# Altium PCB PCB_Rev1.PcbDoc
Units mil, origin at the board's own origin, x right, y up, seen from the top; angles counter-clockwise.
Board outline 2100.17 x 1100.17 mil, 4 copper layers (Top Layer, Power, GND, Bottom Layer), stack 61.2 mil thick; 62 components, 44 nets, 285 pads, 79 vias.
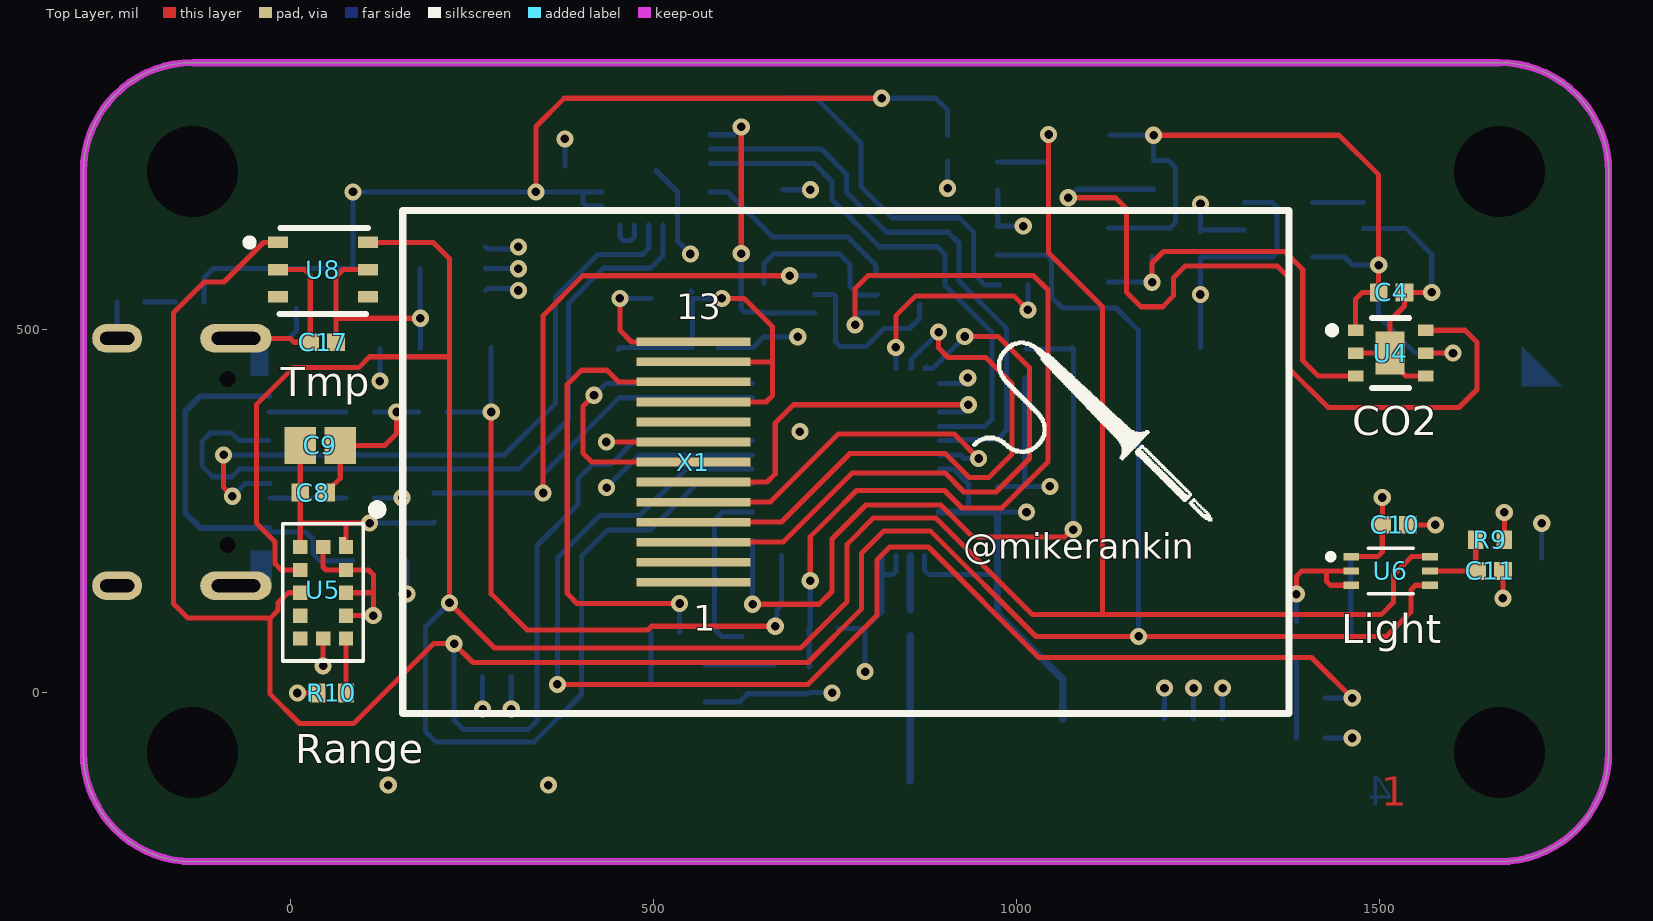
[diagram p0: Top Layer view]
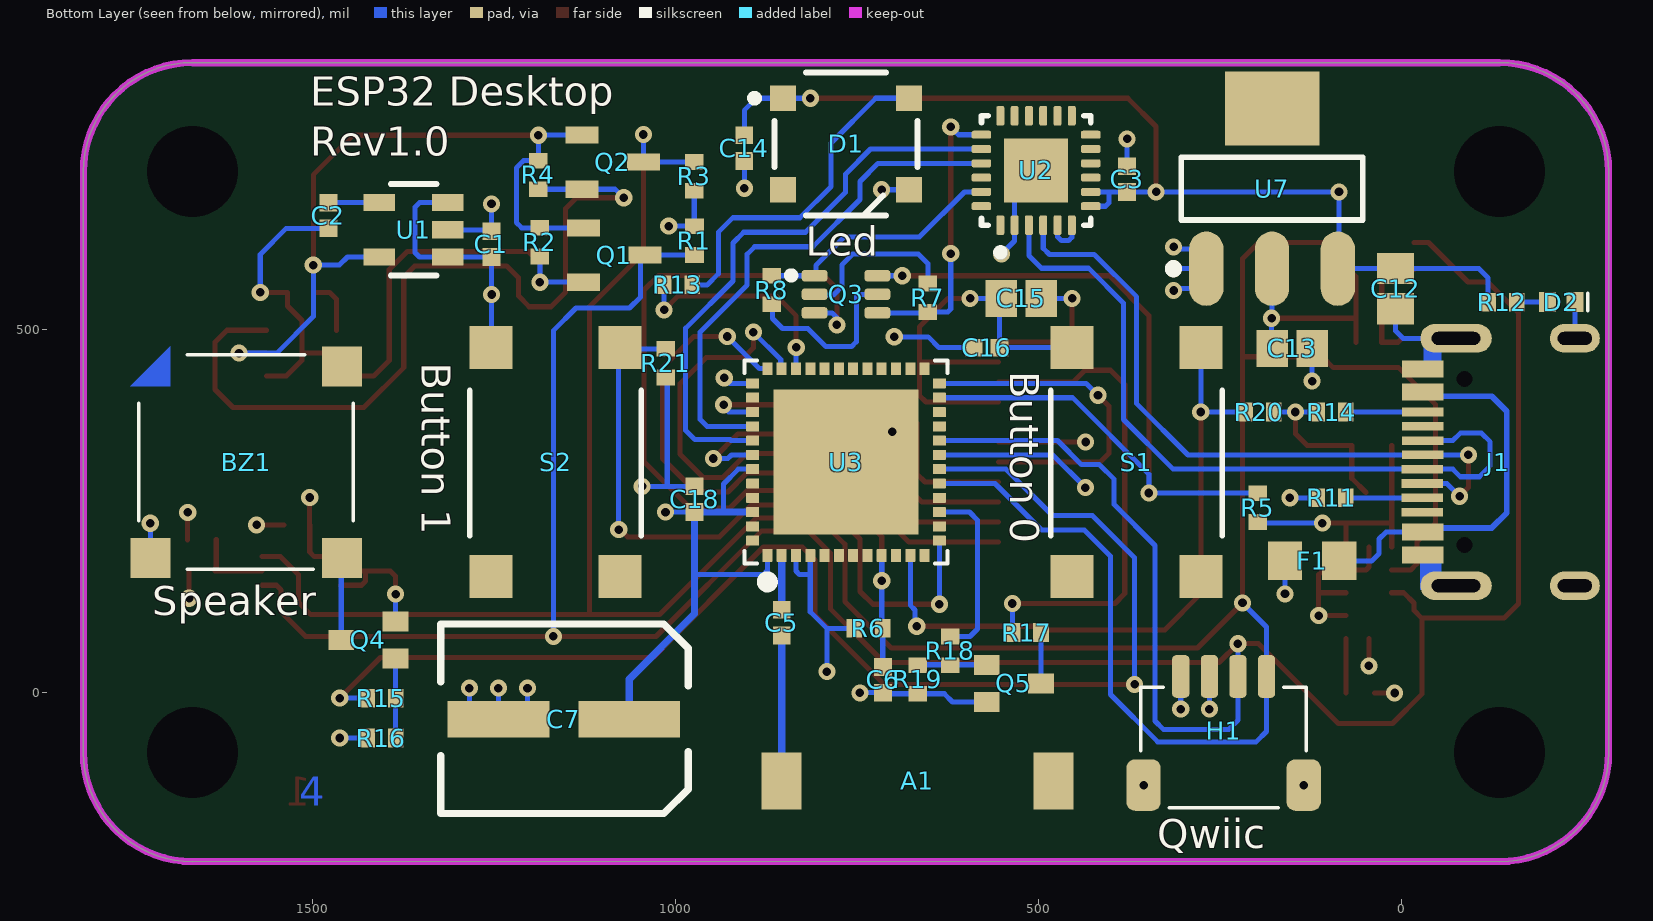
[diagram p1: Bottom Layer view, seen from below]
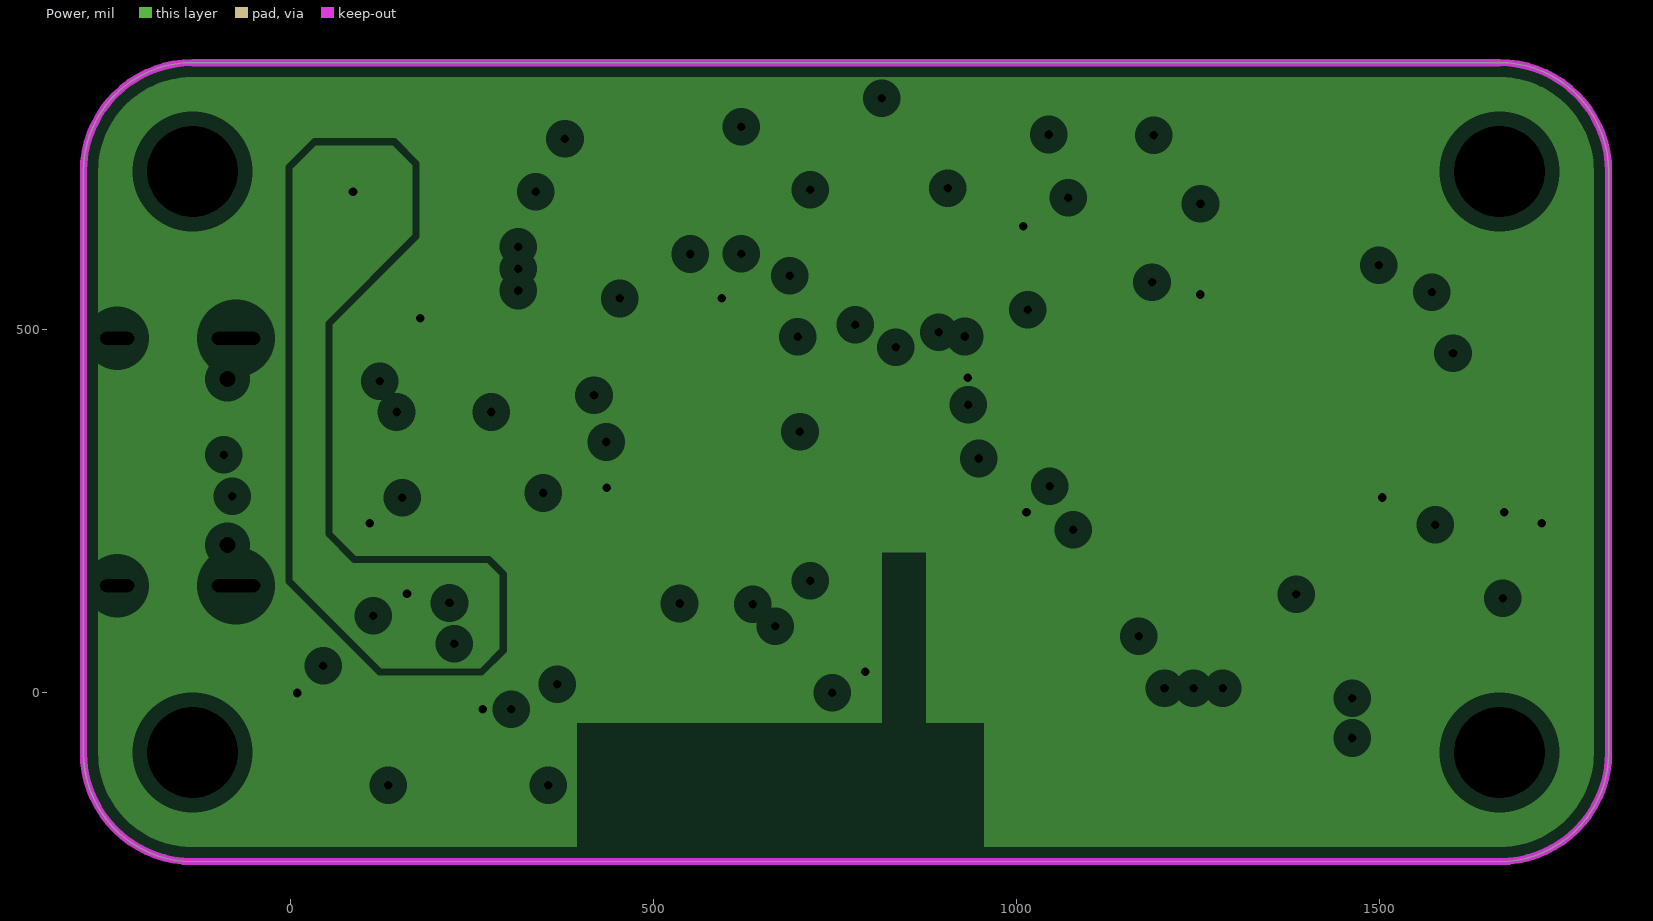
[diagram p2: Power, clearances drawn from the general rule]
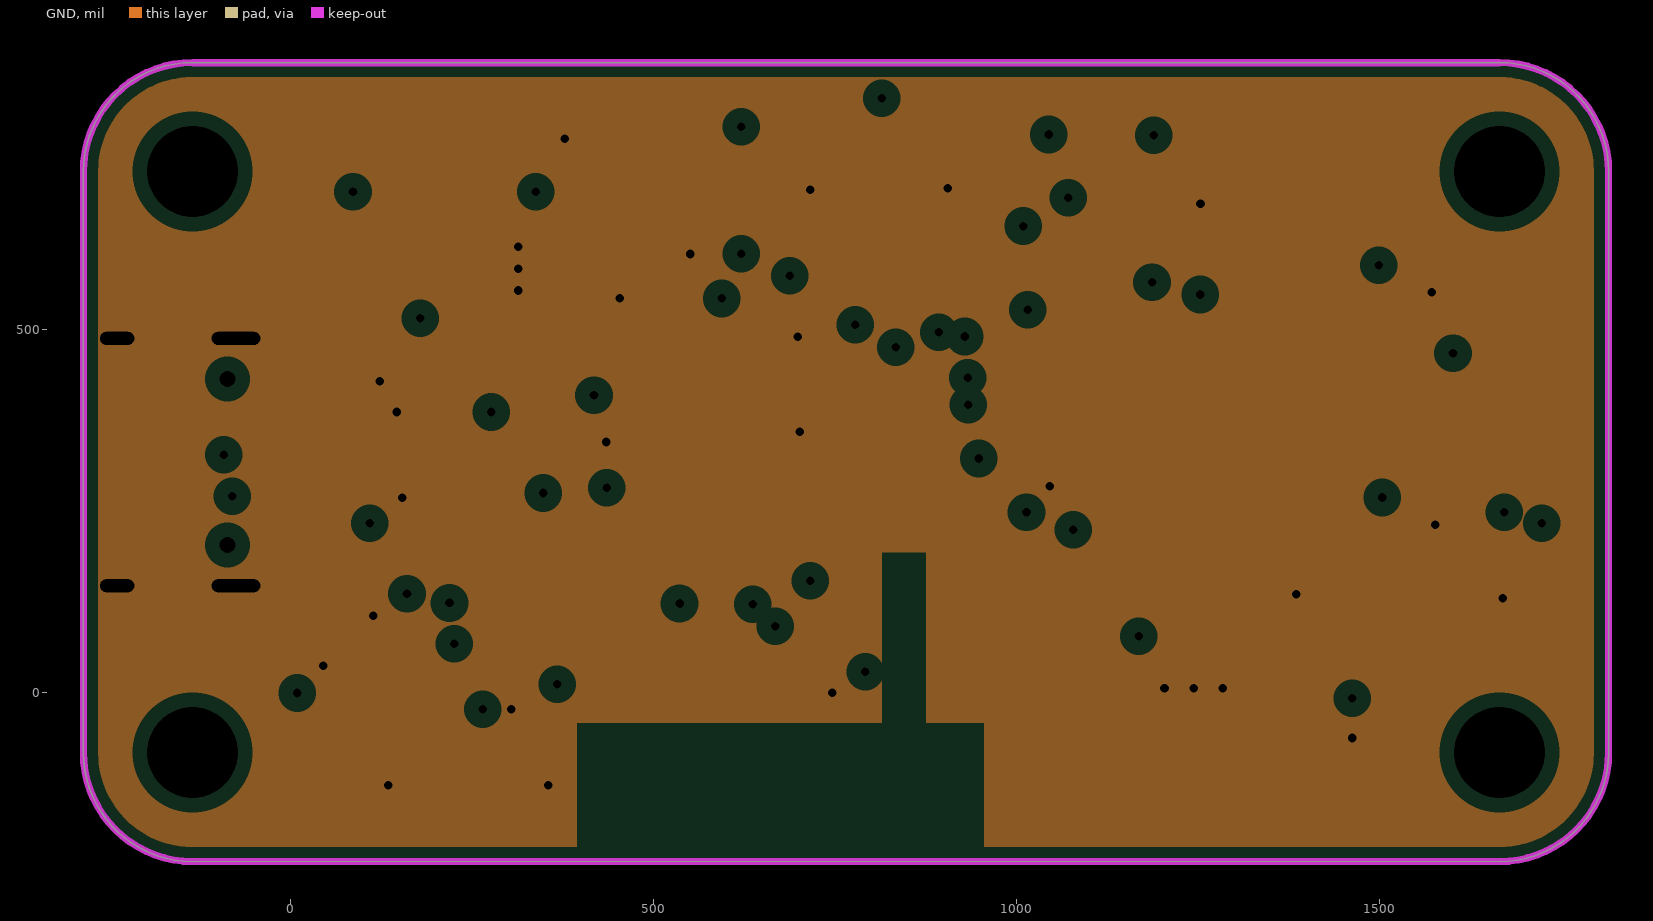
[diagram p3: GND, clearances drawn from the general rule]
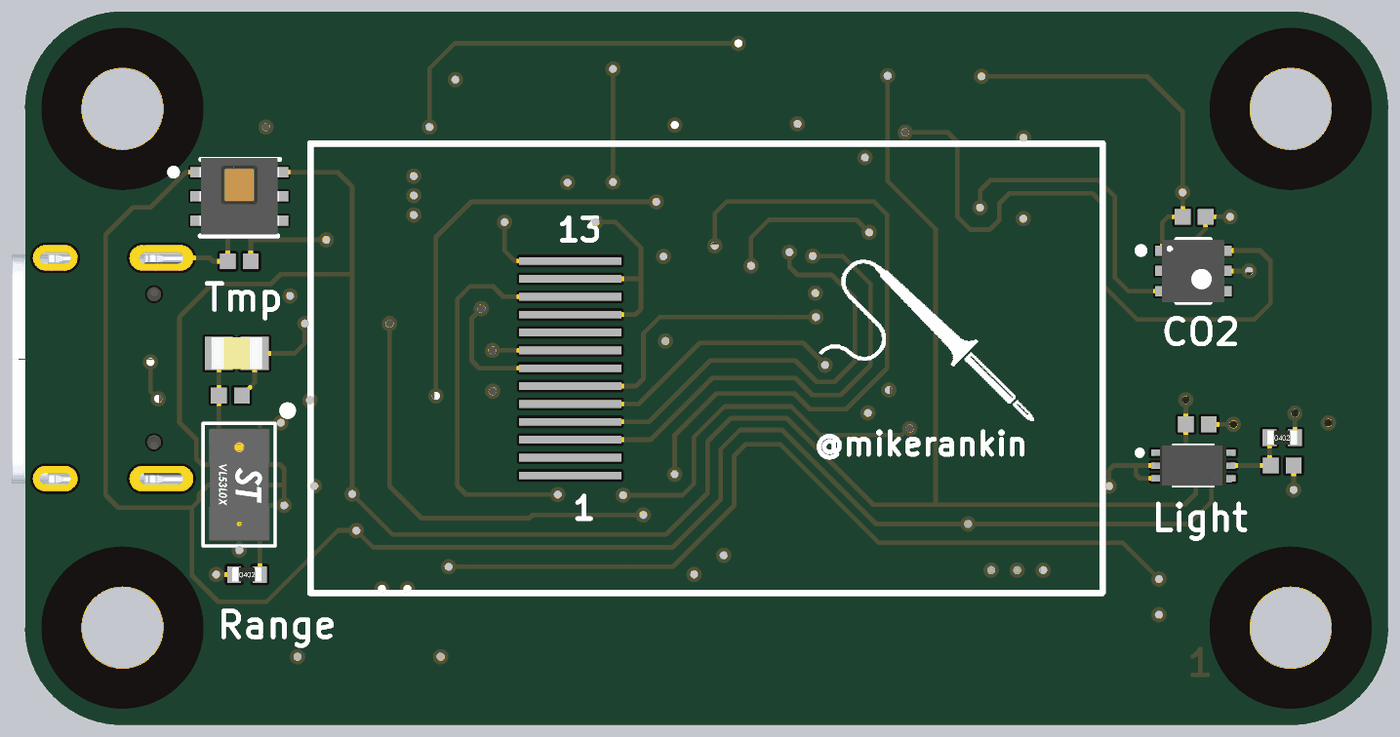
[diagram p4: 3D render of the assembled board from above, using the file's embedded part models]
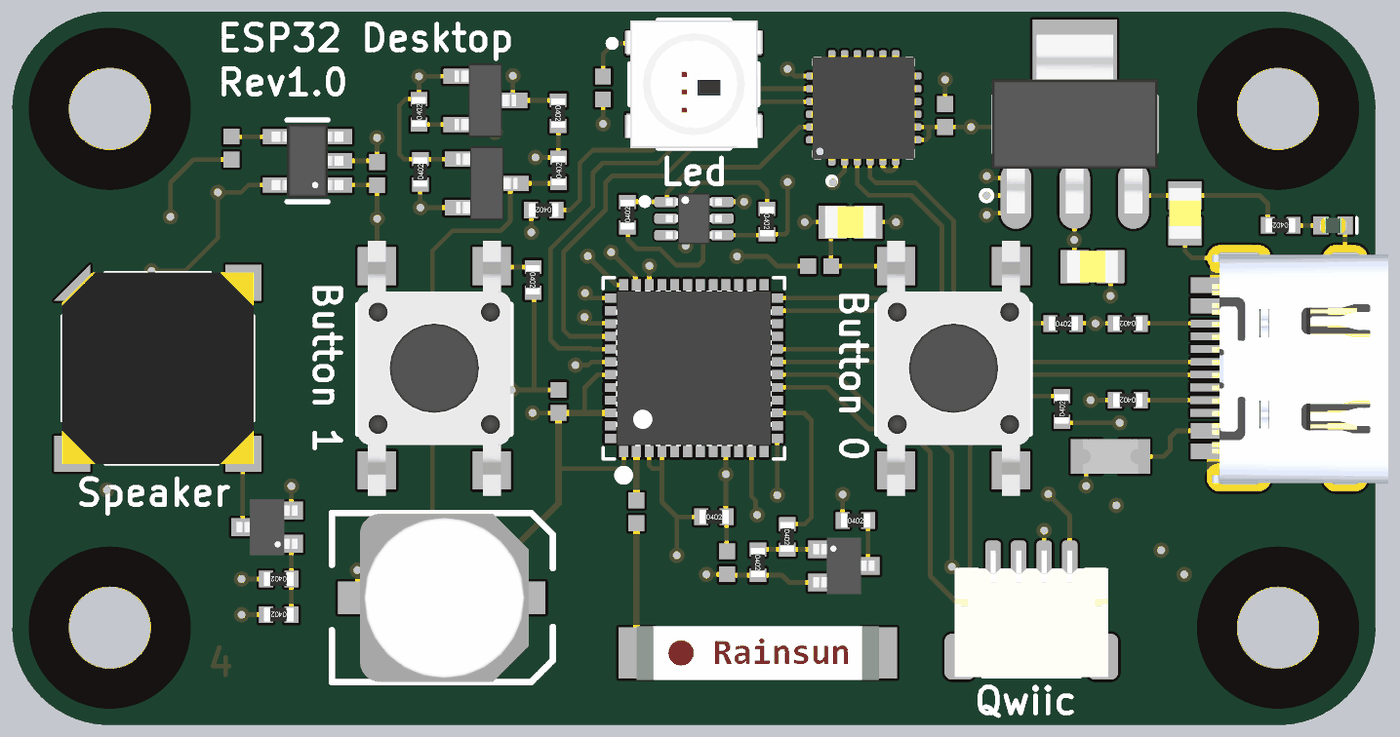
[diagram p5: 3D render of the assembled board from below, using the file's embedded part models]

## Layer stack, top to bottom
Top Solder: solder mask 0.4, Solder Resist, Dk 3.5
Top Layer: signal copper 1.4
Dielectric 2: prepreg 2.8, PP-006, Dk 4.1
Power: plane copper 1.3, net +3.3V
Dielectric 1: dielectric 50.2, FR-4, Dk 4.8
GND: plane copper 1.3, net GND
Dielectric 3: prepreg 2.8, PP-006, Dk 4.1
Bottom Layer: signal copper 1.4
Bottom Solder: solder mask 0.4, Solder Resist, Dk 3.5

## Board outline
-134.49,-232.09 cw(c-134.49,-82.01) -284.57,-82.01 -284.49,-82.01 -284.49,717.99 -284.57,717.99 cw(c-134.49,717.99) -134.49,868.08 -134.49,867.99 1665.51,867.99 1665.51,868.08 cw(c1665.51,717.99) 1815.59,717.99 1815.51,717.99 1815.51,-82.01 1815.59,-82.01 cw(c1665.51,-82.01) 1665.51,-232.09 1665.51,-232.01

## Design rules (kind name [scope] priority, off if disabled: settings)
Clearance Clearance_U6 [All vs InComponent('U6')] p1: gap=5 ignorepadtopadclearanceinfootprint=FALSE
Clearance Clearance_U3 [All vs InComponent('U3')] p2: gap=5.9 ignorepadtopadclearanceinfootprint=FALSE
Clearance Clearance_Q3 [All vs InComponent('Q3')] p3: gap=5 ignorepadtopadclearanceinfootprint=FALSE
Clearance Clearance_U2 [All vs InComponent('U2')] p4: gap=8 ignorepadtopadclearanceinfootprint=FALSE
Clearance Clearance_J1 [All vs InComponent('J1')] p5: gap=7 ignorepadtopadclearanceinfootprint=FALSE
Clearance [All] p6: gap=10 ignorepadtopadclearanceinfootprint=FALSE except(0: Arc-Hole Track-Hole SMDPad-Hole THPad-Hole Via-Hole Fill-Hole Poly-Hole Region-Hole Text-Hole)
HoleSize [All] p1: absolutevalues=TRUE maxlimit=500 minlimit=1 maxpercent=80.000 minpercent=20.000
MinimumSolderMaskSliver [All] p1: minsoldermaskwidth=0.6
PlaneClearance [All] p1: clearance=20
PlaneConnect [All] p1: planeconnectstyle=Relief reliefexpansion=20 reliefentries=4 reliefconductorwidth=10 reliefairgap=10
PolygonConnect PolygonConnect_Via [All vs (IsVia)] p1: connectstyle=Direct reliefconductorwidth=10 reliefentries=4 polygonreliefangle="90 Angle" airgapwidth=10
PolygonConnect [All] p2: connectstyle=Relief reliefconductorwidth=10 reliefentries=4 polygonreliefangle="90 Angle" airgapwidth=10
RoutingVias [All] p1: holewidth=28 width=50 viastyle="Through Hole" minholewidth=28 minwidth=50 maxholewidth=28 maxwidth=50
SilkToSilkClearance [All] p1: silktosilkclearance=2
SilkToSolderMaskClearance [IsPad] p1: minsilkscreentomaskgap=2 clearancetoexposedcopper=TRUE
SolderMaskExpansion [All] p1: expansion=4 istentingtop=FALSE
Width [All] p1: maxlimit=50 minlimit=7 preferedwidth=7
24 further rules are at their usual default settings.

## Components (designator, comment, footprint, x,y, rotation, side; value= is the part's Value field where it differs from the comment)
A1 "Antenna_Chip" AN9520-245 667.09,-120.98 r270 bottom value="Chip Antenna"
BZ1 "BUZZER" ST-025BH 1723.48,186.1 r270 bottom locked
C1 "1uF" CAPC1005X56N 1253.7,618.11 r90 bottom
C2 "22nF" CAPC1005X56N 1478.19,657.48 r270 bottom
C3 "1uF" CAPC1005X56N 378.5,707.68 r90 bottom
C4 "0.1uF" CAPC1005X56N 1516.73,551.56 r0 top
C5 "1.5pF" CAPC1005X56N 854.09,96.73 r270 bottom
C6 "0.1uF" CAPC1005X56N 714.5,18.18 r270 bottom
C7 "150uF" CAP_SM_CAN_0.250_DIA 1064.09,-35.98 r270 bottom
C8 "0.1uF" CAPC1005X56N 31.73,275.98 r0 top
C9 "10uF" CAPC2012X140N 41.57,340.98 r0 top
C10 "0.1uF" CAPC1005X56N 1521.73,231.56 r0 top
C11 "1uF" CAPC1005X56N 1652.36,167.99 r0 top
C12 "10uF" CAPC2012X140N 8.8,556.93 r270 bottom
C13 "10uF" CAPC2012X140N 151.24,474.49 r180 bottom
C14 "0.1uF" CAPC1005X56N 905.51,750.28 r270 bottom
C15 "10uF" CAPC2012X140N 524.37,543.27 r180 bottom
C16 "0.1uF" CAPC1005X56N 571.81,475.47 r0 bottom
C17 "0.1uF" CAPC1005X56N 45.51,482.99 r180 top
C18 "0.1uF" CAPC1005X56N 974.05,266.81 r90 bottom
D1 "RGB" SMD-5050 765.51,755.98 r180 bottom locked value=NeoPixel
D2 "Green Led" LED1005X40N-Green -219.37,538.27 r0 bottom
F1 "TLC-PSMD050" PTC2012X70L 123.66,181.89 r180 bottom
H1 "QWiiC" SM04B-SRSS-TB 245.51,-52.01 r180 bottom locked
J1 "USB-C" TYPE-C-31-M-12 -230.2,488.27 r90 bottom locked
Q1 "" SOT95P240X110-3N 1084.61,603.07 r180 bottom
Q2 "" SOT95P240X110-3N 1086.81,731.02 r180 bottom
Q3 "BC847S" SOT65P210X110-6N 765.51,547.99 r180 bottom value=2NPN
Q4 "MMST3904" SC-70 1423.11,72.99 r0 bottom
Q5 "MMST3904" SC-70 534.33,13.27 r180 bottom
R1 "4.7K" "RESC1005X40L (0402 FOOTPRINT)" 974.13,622.94 r90 bottom
R2 "4.7K" "RESC1005X40L (0402 FOOTPRINT)" 1186.93,620.79 r90 bottom
R3 "4.7K" "RESC1005X40L (0402 FOOTPRINT)" 974.49,711.34 r270 bottom
R4 "4.7K" "RESC1005X40L (0402 FOOTPRINT)" 1189.13,713.31 r90 bottom
R5 "10K" "RESC1005X40L (0402 FOOTPRINT)" 198.5,255.28 r90 bottom
R6 "10K" "RESC1005X40L (0402 FOOTPRINT)" 734.58,88.98 r180 bottom
R7 "10K" "RESC1005X40L (0402 FOOTPRINT)" 652.85,544.17 r270 bottom
R8 "10K" "RESC1005X40L (0402 FOOTPRINT)" 867.85,554.8 r90 bottom
R9 "1K" "RESC1005X40L (0402 FOOTPRINT)" 1652.33,210.99 r0 top
R10 "10K" "RESC1005X40L (0402 FOOTPRINT)" 57.32,0 r0 top
R11 "5.1K" "RESC1005X40L (0402 FOOTPRINT)" 96.93,268.78 r0 bottom
R12 "22K" "RESC1005X40L (0402 FOOTPRINT)" -138.39,538.27 r0 bottom
R13 "100R" "RESC1005X40L (0402 FOOTPRINT)" 996.94,561.89 r0 bottom
R14 "5.1K" "RESC1005X40L (0402 FOOTPRINT)" 96.94,386.89 r0 bottom
R15 "1K" "RESC1005X40L (0402 FOOTPRINT)" 1405.2,-7.01 r0 bottom
R16 "10K" "RESC1005X40L (0402 FOOTPRINT)" 1405.2,-62.01 r0 bottom
R17 "22R" "RESC1005X40L (0402 FOOTPRINT)" 516.61,83.27 r180 bottom
R18 "1K" "RESC1005X40L (0402 FOOTPRINT)" 621.93,57.95 r270 bottom
R19 "10K" "RESC1005X40L (0402 FOOTPRINT)" 666.93,18.58 r270 bottom
R20 "10K" "RESC1005X40L (0402 FOOTPRINT)" 196.31,386.89 r180 bottom
R21 "10K" "RESC1005X40L (0402 FOOTPRINT)" 1013.5,454.21 r270 bottom
S1 "PushButton" TSA063G70-250 365.51,317.99 r180 bottom locked
S2 "PushButton" TSA063G70-250 1165.51,317.99 r180 bottom locked
U1 "1.8V LDO" SOT95P280X144-5N 1360.94,637.8 r0 bottom
U2 "CP2104N" 24-QFN 503.8,719.49 r90 bottom locked
U3 "ESP32-PICO-D4" "QFN48_NEWEST 0.5mm pitch" 765.51,317.99 r90 bottom locked
U4 "SGP30" "DFN-6 (2.45mm X 2.45mm)" 1515.51,467.99 r0 top
U5 "VL53L0CXV0DH" VL53L0CXV0DH 45.51,142.42 r0 top locked value=VL53L0CXV0DH/1
U6 "BH1750FVI" WSOF-6 1515.51,167.99 r0 top
U7 "NCP1117LPST33T3G" SOT230P700X180-4N 178.8,694.49 r270 bottom value="3.3V 1A LDO"
U8 "HDC1080DMBT" HDC1080 45.51,582.99 r0 top
X1 "TFT_1.14\"" "TFT_GLASS 1.14 INCH" 555.51,318.05 r0 top locked

## Footprints (in the part's own frame and the unit in brackets; to place one, negate y for a bottom-side part, rotate by r counter-clockwise, add the part's x,y. Pads: shape width x height; smd on the part's side, far side on the other; paste and mask are expansions set on the pad)
24-QFN [mm] "24-QFN Exposed Pad (4x4)"
  rrect50% 0.69x0.28 smd: 1(-1.912,1.25) 2(-1.912,0.75) 3(-1.912,0.25) 4(-1.912,-0.25) 5(-1.912,-0.75) 6(-1.912,-1.25) 13(1.913,-1.25) 14(1.913,-0.75) 15(1.913,-0.25) 16(1.913,0.25) 17(1.913,0.75) 18(1.913,1.25)
  rrect50% 0.28x0.69 smd: 7(-1.25,-1.913) 8(-0.75,-1.913) 9(-0.25,-1.913) 10(0.25,-1.913) 11(0.75,-1.913) 12(1.25,-1.913) 19(1.25,1.913) 20(0.75,1.913) 21(0.25,1.913) 22(-0.25,1.913) 23(-0.75,1.913) 24(-1.25,1.913)
  rect 2.25x2.25 smd paste-1.3: 25(0,0)
  silkscreen extent -2.99,-1.91 1.91,1.91, body extent -2.05,-2.04 2.05,2.06, height 1.08
AN9520-245 [mm] "Antenna Chip"
  rect 2x1.4 smd: 1(0,-4.75) ""(0,4.75)
  body extent -1.05,-4.75 1.05,4.75, height 1.05
CAP_SM_CAN_0.250_DIA [mil] "SMD Eledtrolytic Capacitor 0.250 DIA"
  rect 50x140 smd: 1(0,0) 2(0,-180)
  silkscreen extent -131,-259 130,81, body extent -130,-216 130,44, height 240
CAPC1005X56N [mm] "Chip Capacitor, 2-Leads, Body 1.0x0.5mm, IPC Medium Density (0402 ceramic)"
  rect 0.62x0.62 smd: 1(-0.45,0) 2(0.45,0)
  body extent -0.55,-0.3 0.55,0.3, height 0.6
CAPC2012X140N [mm] "Chip Capacitor, 2-Leads, Body 2.0x1.3mm, IPC Medium Density (0805 ceramic)"
  rect 1.1x1.3 smd: 1(-0.7,0) 2(0.7,0)
  body extent -1,-0.62 1,0.63, height 1.24
"DFN-6 (2.45mm X 2.45mm)" [mm] "DFN-6 (2.45mm X 2.45mm)"
  rect 0.55x0.4 smd mask+0.076: 1(-1.225,0.8) 2(-1.225,0) 3(-1.225,-0.8) 5(1.225,0) 6(1.225,0.8)
  rect 0.55x0.4 smd paste+0 mask+0.076: 4(1.225,-0.8)
  rect 1x1.5 smd mask+0.076: 7(-0.025,0)
  silkscreen extent -2.17,-1.22 0.65,1.23, body extent -1.22,-1.22 1.22,1.22, height 0.85
HDC1080 [mm] "Temp/Humidity Sensor"
  rect 0.7x0.4 smd mask+0.076: 1(-1.575,0.95) 2(-1.575,0) 3(-1.575,-0.95) 5(1.575,0) 6(1.575,0.95)
  rect 0.7x0.4 smd paste+0 mask+0.076: 4(1.575,-0.95)
  silkscreen extent -2.7,-1.55 1.57,1.45, body extent -1.55,-1.5 1.55,1.5, height 0.85
LED1005X40N-Green [mm] "Chip LED 2-Leads, Body 1.0x0.5mm, (0402)"
  rect 0.6x0.7 smd: 1(-0.475,0) 2(0.475,0)
  silkscreen extent -0.92,-0.3 -0.92,0.3, body extent -0.5,-0.3 0.5,0.3, height 0.2
PTC2012X70L [mm] "Chip Fuse, 2-Leads, Body 2.0x1.3mm, IPC Medium Density (0805)"
  rect 1.2x1.35 smd: 1(-0.95,0) 2(0.95,0)
  body extent -1.07,-0.67 1.08,0.68, height 0.66
"QFN48_NEWEST 0.5mm pitch" [mm] "QFN, 48-Leads, Body 7x7mm, Pitch 0.5mm, IPC Medium Density"
  rrect9% 0.45x0.35 smd: 1(-3.265,2.75) 2(-3.265,2.25) 3(-3.265,1.75) 4(-3.265,1.25) 5(-3.265,0.75) 6(-3.265,0.25) 7(-3.265,-0.25) 8(-3.265,-0.75) 9(-3.265,-1.25) 10(-3.265,-1.75) 11(-3.265,-2.25) 12(-3.265,-2.75) 25(3.265,-2.75) 26(3.265,-2.25) 27(3.265,-1.75) 28(3.265,-1.25) 29(3.265,-0.75) 30(3.265,-0.25) 31(3.265,0.25) 32(3.265,0.75) 33(3.265,1.25) 34(3.265,1.75) 35(3.265,2.25) 36(3.265,2.75)
  rrect9% 0.35x0.45 smd: 13(-2.75,-3.265) 14(-2.25,-3.265) 15(-1.75,-3.265) 16(-1.25,-3.265) 17(-0.75,-3.265) 18(-0.25,-3.265) 19(0.25,-3.265) 20(0.75,-3.265) 21(1.25,-3.265) 22(1.75,-3.265) 23(2.25,-3.265) 24(2.75,-3.265) 37(2.75,3.265) 38(2.25,3.265) 39(1.75,3.265) 40(1.25,3.265) 41(0.75,3.265) 42(0.25,3.265) 43(-0.25,3.265) 44(-0.75,3.265) 45(-1.25,3.265) 46(-1.75,3.265) 47(-2.25,3.265) 48(-2.75,3.265)
  rect 5.08x5.08 smd paste-4: 49(0,0)
  silkscreen extent -4.37,-3.55 3.55,3.55, body extent -3.05,-3.05 3.05,3.05, height 0.9
"RESC1005X40L (0402 FOOTPRINT)" [mm] "Chip Resistor, 2-Leads, Body 1.0x0.5mm, IPC Medium Density (0402)"
  rect 0.55x0.65 smd: 1(-0.5,0) 2(0.5,0)
  body extent -0.57,-0.27 0.58,0.28, height 0.41
SC-70 [mm] "SOT23, 3-Leads, Body 2x1.25mm, Pitch 0.65mm"
  rect 0.9x0.7 smd: 1(-0.95,0.65) 2(-0.95,-0.65) 3(0.95,0)
  body extent -1.2,-1.1 1.2,1.1, height 1
SM04B-SRSS-TB [mm] "CONN HEADER 4POS .100 R/A QWIIC"
  rrect50% 0.6x1.5 smd: 1(1.5,1.9) 2(0.5,1.9) 3(-0.5,1.9) 4(-1.5,1.9)
  rrect50% 1.2x1.8 smd: 5(-2.8,-1.9) 5(2.8,-1.9)
  silkscreen extent -2.9,-2.69 2.9,1.52, body extent -3,-2.69 3,2.26, height 3.25
SMD-5050 [mm] "SMD-5050"
  rect 0.9x0.9 smd: 1(-2.2,1.6) 2(-2.2,-1.6) 3(2.2,-1.6) 4(2.2,1.6)
  silkscreen extent -3.26,-2.5 2.5,2.5, body extent -2.7,-2.5 2.7,2.5, height 1.6
SOT65P210X110-6N [mm] "SC70, 6-Leads, Body 2.4x2.2mm (max), Pitch 0.65mm, IPC Medium Density"
  rrect50% 0.9x0.4 smd mask+0.076: 1(-1.1,0.675) 2(-1.1,0.025) 3(-1.1,-0.625) 4(1.1,-0.625) 5(1.1,0.025) 6(1.1,0.675)
  silkscreen extent -2.04,0.56 -1.79,0.81, body extent -1.1,-0.97 1.1,1.01, height 0.99
SOT95P240X110-3N [mm] "SOT23, 3-Leads, Body 3.0x2.5mm (max), Pitch 0.95mm, IPC Medium Density"
  rect 1.15x0.6 smd: 1(-1.075,0.95) 2(-1.075,-0.95) 3(1.075,0)
  body extent -1.2,-1.45 1.2,1.45, height 0.99
SOT95P280X144-5N [mm] "SOT23, 5-Leads, Body 3.1x3.0mm (max), Pitch 0.95mm, IPC Medium Density (RFMD SOT23-5)"
  rect 1.1x0.6 smd: 1(-1.2,0.95) 2(-1.2,0) 3(-1.2,-0.95) 4(1.2,-0.95) 5(1.2,0.95)
  silkscreen extent -0.8,-1.6 0.8,1.6, body extent -1.4,-1.45 1.4,1.45, height 1.45
SOT230P700X180-4N [mm] "SOT223, 4-Leads, Body 6.7x7.3mm (max), Pitch 2.30mm, IPC Medium Density"
  oval 2.6x1.2 smd: 1(2.8,-2.3) 2(2.8,0) 3(2.8,2.3)
  rect 2.6x3.3 smd: 4(-2.8,0)
  silkscreen extent -1.1,-3.58 2.92,3.18, body extent -3.5,-3.25 3.5,3.25, height 1.65
ST-025BH [mm] "BUZZER SMT 2-4V SMD"
  rect 1.4x1.4 smd: 1(0,0) 2(0,6.7) ""(-6.7,6.7)
  Top Layer region: -7.4,0.7 -6,0.7 -6,-0.7
  silkscreen extent -7.1,-0.4 0.4,7.1, body extent -7.1,-0.4 0.4,7.1, height 2.5
"TFT_GLASS 1.14 INCH" [mm] "TFT_GLASS 0.14 INCH"
  rect 4x0.3 smd: 1(0,-4.2) 2(0,-3.5) 3(0,-2.8) 4(0,-2.1) 5(0,-1.4) 6(0,-0.7) 7(0,0) 8(0,0.7) 9(0,1.4) 10(0,2.1) 11(0,2.8) 12(0,3.5) 13(0,4.2)
  silkscreen extent -10.17,-8.8 20.83,8.8, body extent -10.17,-8.8 20.83,8.8, height 2
TSA063G70-250 [mm] "Tactile Switches SPST 6.10mm x 6.10mm 3.50mm 50mA @ 12VDC SMD RoHS"
  rect 1.5x1.5 smd: 1(2.25,4) 2(-2.25,4) ""(-2.25,-4) ""(2.25,-4)
  silkscreen extent -3,-2.58 3,2.5, body extent -3,-5 3,5, height 7.12
TYPE-C-31-M-12 [mm] "USB-C Connector"
  oval 1x1.75 hole 0.45 slot 1.2 at 90 deg: 1(-8.65,-0.2) 1(0,-0.2)
  oval 1x2.5 hole 0.45 slot 1.7 at 90 deg: 1(-8.65,3.955) 1(0,3.955)
  rect 0.3x1.45 smd: A1(-7.726,5.119) A4(-6.926,5.117) A5(-5.575,5.142) A6(-4.575,5.142) A7(-4.075,5.117) A8(-3.075,5.117) A9(-1.727,5.117) A12(-0.924,5.117) B1(-1.224,5.117) B4(-2.021,5.117) B5(-2.575,5.117) B6(-3.575,5.117) B7(-5.075,5.142) B8(-6.075,5.142) B9(-6.626,5.117) B12(-7.426,5.119)
  round 0.508 hole 0.559 unplated: ""(-7.225,3.667) ""(-1.425,3.667)
  body extent -8.82,-1.89 0.12,5.01, height 3.31
VL53L0CXV0DH [mm] "IC,LASER SENSOR,12pin"
  rect 0.25x0.25 smd: 1(0.675,1.713)
  rect 0.5x0.5 smd: 1(0.8,1.488) 2(0.8,0.687) 3(0.8,-0.112) 4(0.8,-0.913) 5(0.8,-1.712) 6(0,-1.712) 7(-0.8,-1.712) 8(-0.8,-0.912) 9(-0.8,-0.112) 10(-0.8,0.688) 11(-0.8,1.488) 12(0,1.488)
  silkscreen extent -1.42,-2.5 2.09,3, body extent -1.2,-2.3 1.2,2.1, height 1
WSOF-6 [mm] "WSOF-6"
  rect 0.55x0.25 smd: 1(-1.375,0.5) 2(-1.375,0) 3(-1.375,-0.5) 4(1.375,-0.5) 5(1.375,0) 6(1.375,0.5)
  silkscreen extent -2.2,-0.8 0.78,0.8, body extent -1.5,-0.8 1.5,0.8, height 0.75

## Part data
A1: "Antenna Chip 2.4Gig", Manufacturer=Rainsun, Part_Number=C99665, Vendor=LCSC
BZ1: library part Buzzer_SMT, "BUZZER MAGNETIC 2.7kHz Tone 2-4V SMD", Manufacturer=SOBERTON, Part_Number=ST-025BH, Vendor=Digi-Key
C1: library part CAP_0402, "CAP 1uF 0402", Part_Footprint=0402
C2: library part CAP_0402, "CAP 22nF 0402", Part_Footprint=0402, Vendor=LCSC
C3 C11: library part CAP_0603, "CAP 1uF 16V 0402", Manufacturer=Walsin, PartNumber=C83063, Vendor=LCSC
C4 C10 C14 C18: library part CAP_0402, "CAP 0.1uF 0402", Part_Footprint=0402
C5: library part CAP_0402, "CAP 1.5pF 0402", Manufacturer=Dafron, Part_Footprint=0402, Part_Number=C147344, Vendor=LCSC
C6 C8 C16 C17: library part CAP_0402, "CAP 0.1uF 0402", Manufacturer=CCTC, PartNumber=C344190, Vendor=LCSC
C7: library part CAP_ELEC_SMT, "CAP 150uF, 10V SMT", Manufacturer=Suncon, Part_Footprint=SMD,6.3x6mm, Part_Number=C242018, Vendor=LCSC
C9 C15: library part CAP_0805, "CAP 10uF 0805", Manufacturer=Samsung, PartNumber=C307520, Vendor=LCSC
C12 C13: library part CAP_0805, "CAP 10uF 16V 0805", Manufacturer=Murata, PartNumber=C162317, Part_Footprint=0805, Vendor=LCSC
D1: library part WS2812, "LED,RGB,NEOPIXEL,WS2818", Manufacturer=Worldsemi, Part_Footprint=SMD-5050, Part_Number=C139127, Vendor=LCSC
D2: library part LED_0402_SMALL_GREEN, "LED Green 0402", Part_Footprint=0402, Part_Number=C74338, Vendor=LCSC
F1: library part PTC_FUSE, "PTC FUSE 500mA hold, 1A trip 0805 SMD", LCSC_Part_Number=C261942, Manufacturer=TLC, Man_Part_Number=TLC-PSMD050, Vendor=LCSC
H1: library part SM04B-SRSS-TB, "CONN HEADER 4POS .100 R/A QWIIC", Manufacturer=JST, PartNumber=SM04B-SRSS-TB(LF)(SN), Vendor=Digi-Key
J1: "CONN RECPT USB-C", Manufacturer=KHE, Part_Footprint=SMT, Part_Number=C165948, Vendor=LCSC
Q1 Q2: library part AO3400A, "MOSFET N-CH 30V 35.7A SOT-23", Manufacturer="Alpha & Omega", Part_Footprint=SOT-23, PartNumber=AO3400A, Vendor=Digi-Key
Q3: "TRANS 2NPN 44V 0.1A SC-70-6", Manufacturer=Changjiang, PartNumber=BC847S, Vendor=LCSC
Q4 Q5: "TRANSISTOR NPN GP 40V SC-70", Manufacturer=Changjiang, Part_Footprint=SC-70, Part_Number=C54879, Vendor=LCSC
R1 R2 R3 R4: library part RES_0402, "RES 4.7K 0402"
R5 R6 R7 R8 R10 R16 R19: library part RES_0402, "RES 10K 0402", Manufacturer=Guangdong, PartNumber=C258091, Vendor=LCSC
R9 R18: library part RES_0402, "RES 1K 0402", Manufacturer=Yageo, PartNumber=C106235, Vendor=LCSC
R11 R14: library part RES_0603, "RES 5.1K 0402", Vendor=LCSC
R12: library part RES_0603, "RES 22K 0402", Manufacturer="LIZ Elec", PartNumber=C100310, Vendor=LCSC
R13: library part RES_0603, "RES 100R 0402", LCSC_Part_Number=C106232, Manufacturer=Yageo, Man_Part_Number=RC0402FR-07100RL, Vendor=LCSC
R15: library part RES_0402, "RES 1K 0402", Vendor=Digi-Key
R17: library part RES_0402, "RES 22R 0402", Manufacturer=Uniroyal, PartNumber=C25092, Vendor=LCSC
R20 R21: library part RES_0402, "RES 10K 0402", Manufacturer=Guangdong, Part_Footprint=0402, Part_Number=C258091, Vendor=LCSC
S1 S2: library part TSA063G70-250, "SWITCH TACTILE SPST-NO", Manufacturer=Bright, PartNumber=C294567, Part_Footprint=SMD,6.1x6.1x3.5mm, Vendor=LCSC
U1: library part RT9193-18GB, "IC REG LDO 1.8V 300mA SOT23-5", Manufacturer="Richtek USA", Part_Footprint=SOT23-5, PartNumber=RT9193-18GB, Vendor=Digi-Key
U2: "IC BRIDGE USB TO UART 24QFN", Manufacturer="Silicon Labs", PartNumber=C47742, Part_Footprint=24QFN, Vendor=LCSC
U3: "RF Transceiver ICs QFN-48_7x7x05P RoHS", Manufacturer=Espressif, PartNumber=C193707, Vendor=LCSC
U4: "TVOC/CO2 Sensor", Manufacturer="Sensirion AG", PartNumber=SGP30-2.5K, Part_Footprint=6-DFN, Vendor=Digi-Key
U5: "LASER SENSOR", Manufacturer="ST MICRO", PartNumber=C91199, Vendor=LCSC
U6: "Optical Sensor Ambient I2C 6-SMD", Manufacturer=Rohm, Part_Footprint=6WSOF, Part_Number=C78960, Vendor=LCSC
U7: "IC REG LDO 3.3V 1A SOT223-3", Manufacturer="ON Semi", PartNumber=NCP1117LPST33T3G, Vendor=Digi-Key
U8: "Humidity/Temperature Sensor", Manufacturer="Texas Instruments", PartNumber=C82227, Vendor=LCSC
X1: library part "TFT_GLASS 1.14 INCH COLOR", "1.14 INCH TFT GLASS COLOR", Manufacturer=BuyDisplay, Part_Number=ER-TFT1.14-1, Vendor=BuyDisplay

## Free pads (board coordinates)
  round 124 hole 125: ""(-134.49,-82.01) ""(-134.49,717.99) ""(1665.51,-82.01) ""(1665.51,717.99)
  round 250 on Top Solder: ""(-134.49,-82.01) ""(-134.49,717.99) ""(1665.51,-82.01) ""(1665.51,717.99)
  round 250 on Bottom Solder: ""(-134.49,-82.01) ""(-134.49,717.99) ""(1665.51,-82.01) ""(1665.51,717.99)

## Via types
v1: diameter 23.62, hole 11.81, Top Layer to Bottom Layer, tented both sides, 79 vias

## Nets (pads, with @x,y where several pads share a name; then routed paths per layer and width w, separated by ;. In a path a pad name is that pad's centre, name@x,y a point inside that pad or via, vN(x,y) a via of type N, cw(c..) or ccw(c..) an arc to the next point about the centre after c; other vN are vias at no path point)
+1.8V: C4.1 Q1.1 Q2.1 R2.2 R4.2 U1.5 U4.1 U4.5 | length 1200.2
  Top Layer w7: v1(1189.13,767.98) 1444.49,767.98 1499.02,713.45 v1(1499.02,589.19) C4.1 1476.48,551.56 1467.28,542.36 U4.1 ; U4.5 v1(1601.38,467.99)
  Bottom Layer w7: Q1.1 R2.2 1211.98,640.47 1219.49,647.98 1219.49,722.98 1209.47,732.99 R4.2 v1(1189.13,767.98) 1188.68,768.43 Q2.1 ; U1.5 1452.07,600.39 1463.27,589.19 v1(1499.02,589.19) 1499.02,518.45 1549.47,467.99 v1(1601.38,467.99)
+3.3V: BZ1.1 C1.1 C7.1 C8.1 C9.1 C10.1 C13.1 C15.1 C16.1 C17.1 C18.1 H1.3 R1.2 R3.2 R5.1 R6.1 R9.2 R10.1 S1.2 S2.2 U1.1 U1.3 U3.1 U3.3 U3.4 U3.19 U3.37 U3.43 U3.46 U5.1 U5.11 U6.1 U7.2 U8.5 X1.10 X1.12 | length 3212.7
  Top Layer w7: v1(10,0) R10.1 ; U5.11 14.02,233.98 ; C9.1 C8.1 14.02,233.98 ; C17.1 63.23,515.98 ; U5.1@77.01,200.98 77.01,233.98 ; U8.5 72.91,582.99 63.23,573.31 63.23,515.98 ; v1(109.49,233.98) 77.01,233.98 ; v1(179.49,515.98) 63.23,515.98 ; X1.10 655.47,400.73 664.49,409.75 664.49,455.85 ; X1.12 664.49,455.85 ; v1(594.57,543.27) 625.25,543.27 664.49,504.03 664.49,455.85 ; U6.1 1497.6,187.68 1503.9,193.98 1503.9,231.44 C10.1 v1(1504.02,269.19) ; R9.2 v1(1672.02,248.63) ; 14.02,233.98 77.01,233.98
  Bottom Layer w7: v1(109.49,233.98) 196.89,233.98 R5.1 ; C13.1 179.49,475.18 v1(179.49,515.98) 179.14,516.32 179.14,583.91 U7.2 ; v1(265.2,-22.2) H1.3 ; v1(435.83,282.8) 480.87,327.83 U3.19 ; S1.2@451.63,473.01 S1.2 C16.1 554.09,541.1 C15.1 v1(594.57,543.27) ; C15.1@551.93,553.27 C15.1@553.19,552.01 ; R6.1 791.9,88.98 ; v1(791.9,29.5) 791.9,88.98 ; U3.4 814.72,162.98 ; U3.3 834.41,167.9 829.49,162.98 814.72,162.98 ; U3.1 873.78,168.68 879.49,162.98 974.05,162.98 ; U3.43 913.83,308.15 934.05,287.92 934.05,249.09 ; U3.37 925.46,426.26 v1(933.09,433.89) ; R1.2@973.78,642.98 R1.2 974.49,642.98 R3.2 ; C18.1 v1(1014.05,249.09) ; R1.2@975.2,642.98 v1(1009.49,642.98) ; S2.2 1253.7,475.87 C1.1 U1.1 1352.68,600.39 1358.9,606.61 1358.9,668.98 1352.68,675.2 U1.3 ; BZ1.1 v1(1723.48,233.74) ; 791.9,88.98 814.72,111.8 814.72,162.98
  Bottom Layer w10: U3.46 934.05,249.09 C18.1 974.05,162.98 974.05,109.09 1064.09,19.06 C7.1
  other v1: 1253.48,548.74
BUTTON_0: R20.1 S1.1 U3.11 | length 914.9
  Top Layer w7: v1(276.93,386.89) 276.93,136.54 326.57,86.89 492.58,86.89 497.58,91.89 v1(668.09,91.89)
  Bottom Layer w7: R20.1 v1(276.93,386.89) S1.1 ; v1(668.09,91.89) 670.4,94.2 670.4,114.2 676.93,120.73 U3.11
BUTTON_1: R21.1 S2.1 U3.13 | length 965.5
  Top Layer w7: v1(636.97,122.23) 728.42,122.23 746.09,139.89 746.09,211.89 793.09,258.89 896.09,258.89 940.09,214.89 1066.09,214.89 1076.16,224.96 v1(1078.5,224.96)
  Bottom Layer w7: v1(636.97,122.23) U3.13 ; R21.1 1075.35,473.9 S2.1 1078.5,473.9 v1(1078.5,224.96)
D+: J1.A6 J1.B6 U2.3 | length 1038.3
  Bottom Layer w7: J1.B6 -70.12,347.52 -80.4,357.8 -109.46,357.8 -121.46,345.8 -121.46,312.8 -106.46,297.8 -80.46,297.8 -70.12,308.15 J1.A6 315,308.15 383.3,376.45 383.3,536.79 431.4,584.89 496.4,584.89 513.64,602.13 U2.3
D-: J1.A7 J1.B7 U2.4 | length 942.2
  Top Layer w7: v1(-91.46,327.8) -91.46,282.8 v1(-79.46,270.8)
  Bottom Layer w7: v1(-91.46,327.8) J1.A7 294.68,327.83 365.3,398.45 365.3,545.45 423.74,603.89 485.4,603.89 493.96,612.44 U2.4 ; v1(-79.46,270.8) -61.8,288.46 J1.B7
DC: U3.42 X1.5 | length 505.7
  Top Layer w7: X1.5 661.13,262.93 755.09,356.89 914.09,356.89 v1(948.09,322.89) v1@948.09,324.89
  Bottom Layer w7: U3.42 923.28,327.83 928.22,322.89 v1(948.09,322.89) v1@946.64,324.33
DTR: Q3.1 R8.2 U2.23 | length 343.8
  Bottom Layer w7: U2.23 602.5,689.96 664.49,627.98 767.77,627.98 806.91,588.84 806.91,576.48 Q3.1 867.78,574.57 R8.2
EN: C6.1 Q3.3 R6.2 U3.9 | length 1216
  Top Layer w7: v1(716.3,154.45) 716.3,215.1 743.09,241.89 780.09,278.89 901.09,278.89 925.09,254.89 980.09,254.89 1043.5,318.31 1043.5,554.96 1023.5,574.96 796.16,574.96 778.09,556.89 v1(778.09,506.89)
  Bottom Layer w7: C6.1 714.9,36.29 R6.2 716.3,90.38 v1(716.3,154.45) U3.9 ; v1(778.09,506.89) 778.09,516.89 784.58,523.39 Q3.3
GND: C1.2 C2.2 C3.2 C4.2 C6.2 C7.2 C8.2 C9.2 C10.2 C11.2 C12.2 C13.2 C14.2 C15.2 C16.2 C17.2 C18.2 D1.3 D2.1 H1.4 H1.5 J1.1 J1.A1 J1.A12 J1.B1 J1.B12 Q4.2 Q5.2 R11.2 R14.2 R16.2 R19.2 R20.2 R21.2 U1.2 U2.2 U2.25 U3.49 U4.2 U4.4 U4.7 U5.2 U5.3 U5.4 U5.6 U5.12 U6.2 U6.3 U7.1 U8.2 X1.8 X1.13 | length 3214.9
  Top Layer w7: J1.1@-74.49,488.27 0.25,488.27 5.53,482.99 C17.2 27.79,574.67 19.49,582.98 U8.2 ; v1(45.51,37.36) U5.6 ; U5.12 45.51,173.59 49.61,169.49 U5.2 107.98,169.49 114.64,162.82 114.64,137.99 ; C8.2 69.13,295.67 C9.2 130.72,340.98 146.63,356.89 v1(146.63,386.89) ; U5.4 v1(114.64,106.5) 114.64,137.99 ; U5.3 114.64,137.99 ; v1(435.51,345.61) X1.8 ; v1(454.17,543.27) 454.17,499.45 470.22,483.41 X1.13 ; v1(1385.71,136.22) 1385.71,160.81 1392.89,167.99 1427.14,167.99 ; U6.3 1432.81,148.31 1430.53,150.59 1427.14,153.99 1427.14,167.99 ; U6.2 1427.14,167.99 ; U4.2 U4.7 ; C10.2 v1(1577.09,231.56) ; U4.4 1536.18,436.5 1514.53,458.15 U4.7 ; v1(1572.09,551.56) C4.2 1534.45,532.8 1514.53,512.87 U4.7 ; v1(1670.08,130.35) C11.2
  Bottom Layer w7: J1.1@-238.07,488.27 D2.1 ; J1.1@-74.49,488.27 -1.63,488.27 8.8,498.7 C12.2 ; R11.2 v1(154.25,268.78) ; R14.2 v1(146.63,386.89) R20.2 ; v1(123.68,429.49) C13.2 ; U7.1@269.35,554.25 272.32,557.22 311.38,557.22 v1(314.35,554.25) ; U7.1 v1(314.35,584.25) ; U7.1@269.35,614.25 272.32,611.28 311.38,611.28 v1(314.35,614.25) ; v1(304.57,-22.2) H1.4 ; C3.2 v1(378.5,763.03) ; v1(454.17,543.27) C15.2 ; U2.25 533.33,689.96 U2.2 533.33,622.42 v1(551.3,604.45) ; Q5.2 609.37,-12.32 618.87,-12.32 630.09,-1.1 R19.2 712.94,-1.1 C6.2 v1@746.66,0.46 ; C16.2 637.32,475.47 652.32,490.47 v1(699.09,490.47) ; D1.3 v1(716.53,692.99) ; v1(905.51,694.92) C14.2 ; C18.2 1011.69,284.53 ; R21.2 1011.69,432.72 1011.69,284.53 ; v1(1046.3,284.45) 1011.77,284.45 1011.69,284.53 ; C7.2@1204.09,-35.98 v1(1204.09,6.65) ; C7.2 v1(1244.09,6.65) ; v1(1253.7,673.46) C1.2 1255.67,637.8 U1.2 ; C7.2@1284.09,-35.98 v1(1284.09,6.65) ; Q4.2 v1(1385.71,136.22) ; R16.2 v1(1462.52,-62.01) ; C2.2 1536.24,639.76 1572.09,603.91 v1(1572.09,551.56)
  other v1: 135.28,-126.81 355.75,-126.81 746.36,0.17 702.09,359.89
IO0: Q3.6 R5.2 U3.23 | length 1149.7
  Top Layer w7: v1(348.5,275.4) 348.5,519.96 403.11,574.57 v1(688.08,574.57)
  Bottom Layer w7: R5.2 198.94,275.4 v1(348.5,275.4) ; v1@348.5,274.96 348.5,301.65 453.42,406.57 U3.23 ; v1(688.08,574.57) Q3.6
LCD_BL: R18.1 U3.15 | length 248.8
  Bottom Layer w7: R18.1 594.83,77.64 584.49,87.98 584.49,237.98 595.61,249.09 U3.15
NEOPIXEL: R13.2 U3.34 | length 308.7
  Top Layer w7: v1(834.09,475.89) 834.09,519.35 861.63,546.89 996.63,546.89 v1(1016,527.52)
  Bottom Layer w7: v1(834.09,475.89) 834.25,475.73 834.25,446.7 U3.34 ; v1(1016,527.52) R13.2@1016,561.89
NetA1_1: A1.1 C5.2 | length 200
  Bottom Layer w10: A1.1 C5.2
NetBZ1_2: BZ1.2 Q4.3 | length 113.4
  Bottom Layer w7: BZ1.2 1460.51,185.3 Q4.3
NetC2_1: C2.1 U1.4 | length 70
  Bottom Layer w7: U1.4 C2.1
NetC5_1: C5.1 U3.2 | length 75
  Bottom Layer w10: C5.1 U3.2
NetC11_1: C11.1 R9.1 U6.5 | length 108.8
  Top Layer w7: U6.5 C11.1 1632.65,169.99 R9.1
NetD1_4: D1.4 R13.1 | length 472.9
  Bottom Layer w7: D1.4 724.54,818.98 786.3,757.22 786.3,697.22 829.07,654.45 921.3,654.45 941.3,634.45 941.3,577.22 956.63,561.89 R13.1@976.63,561.89
NetD2_2: D2.2 R12.1 | length 42.6
  Bottom Layer w7: D2.2 R12.1
NetF1_2: F1.2 J1.A4 J1.A9 J1.B4 J1.B9 | length 543.1
  Bottom Layer w7: J1.A4 J1.A4@-28.74,221.49 ; J1.B9 J1.A4@-28.74,221.49 ; F1.2 41.63,181.89 31.63,191.89 31.63,211.89 22.03,221.49 J1.A4@-28.74,221.49
  Bottom Layer w8: J1.B9 -123.69,227.39 -144.29,247.99 -144.29,387.99 -123.59,408.69 J1.B4
NetJ1_A5: J1.A5 R11.1 | length 105
  Bottom Layer w7: J1.A5 R11.1
NetJ1_B5: J1.B5 R14.1 | length 106
  Bottom Layer w7: J1.B5 R14.1
NetQ3_2: Q3.2 R7.1 | length 230.3
  Bottom Layer w7: R7.1 652.85,591.34 665.96,604.45 756.3,604.45 771.3,589.45 771.3,559.45 782.77,547.98 807.82,547.98 Q3.2
NetQ3_5: Q3.5 R8.1 | length 247.6
  Bottom Layer w7: Q3.5 748.49,548.98 751.3,546.17 751.3,483.68 758.09,476.89 793.09,476.89 818.09,501.89 853.09,501.89 866.87,515.67 866.87,535.12 R8.1
NetQ4_1: Q4.1 R15.1 R16.1 | length 109.5
  Bottom Layer w7: R16.1 1385.71,-61.81 Q4.1
NetQ5_1: Q5.1 R18.2 R19.1 | length 95.4
  Bottom Layer w7: Q5.1 666.34,38.86 R19.1
NetQ5_3: Q5.3 R17.2 | length 70
  Bottom Layer w7: Q5.3 R17.2
NetR17_1: R17.1 X1.11 | length 676.9
  Top Layer w7: v1(536.3,123.27) 395.25,123.27 381.63,136.89 381.63,424.78 401.3,444.45 436.3,444.45 452.46,428.29 X1.11
  Bottom Layer w7: R17.1 v1(536.3,123.27)
NetU2_5: U2.5 U2.6 | length 56.5
  Bottom Layer w7: U2.6 454.59,627.39 459.09,622.89 468.87,622.89 474.27,628.29 U2.5
RST: U3.39 X1.6 | length 509.6
  Top Layer w7: X1.6 656.69,290.49 668.09,301.89 668.09,371.89 693.09,396.89 v1(934.09,396.89)
  Bottom Layer w7: U3.39 927.09,386.89 934.09,393.89 v1(934.09,396.89)
RTS: Q3.4 R7.2 U2.19 | length 401.3
  Top Layer w7: v1(621.3,605.08) v1(621.3,779.45) v1@621.3,780.13
  Bottom Layer w7: U2.19 610.55,768.7 v1(621.3,779.45) ; v1(621.3,605.08) 621.3,528.59 625.4,524.49 R7.2 653.96,523.39 Q3.4
RXD: U2.21 U3.40 | length 719.5
  Bottom Layer w7: U2.21 721.42,729.33 746.3,704.45 746.3,679.45 811.3,614.45 891.3,614.45 901.63,604.12 901.63,561.89 966.3,497.22 966.3,376.56 956.94,367.2 U3.40
SCL: H1.1 Q2.3 R3.1 U3.17 U5.10 U6.6 U8.6 | length 4469
  Top Layer w7: U5.10 -12.02,169.49 -20.51,177.98 -20.51,207.98 -46.5,233.96 -46.5,396.99 4.49,447.98 94.49,447.98 109.49,462.98 219.49,462.98 ; U8.6 197.07,620.39 219.49,597.98 219.49,462.98 ; v1(1044.49,769.03) 1044.49,606.26 1118.5,532.24 1118.5,107.9 ; U6.6 1544.19,187.68 1519.49,162.98 1519.49,124.88 1502.4,107.8 1118.5,107.8 1022.18,107.8 889.09,240.89 803.09,240.89 767.09,204.89 767.09,125.89 703.09,61.89 281.57,61.89 v1(219.49,123.98) 219.49,462.98
  Bottom Layer w7: v1(219.49,123.98) 186.46,90.94 H1.1 186.46,-52.99 200.67,-67.2 336.34,-67.2 401.3,-2.24 401.3,188.27 437.48,224.45 496.3,224.45 560.31,288.46 U3.17 ; R3.1 Q2.3 v1(1044.49,769.03)
SCL_CO2: Q2.2 R4.1 U4.6 | length 1159.5
  Top Layer w7: v1(1071.63,681.89) 1136.63,681.89 1151.63,666.89 1151.63,551.89 1171.63,531.89 1201.63,531.89 1216.63,546.89 1216.63,571.89 1232.72,587.98 1359.49,587.98 1374.49,572.98 1374.49,447.98 1429.49,392.98 1609.49,392.98 1634.49,417.98 1634.49,482.98 1617.98,499.49 U4.6
  Bottom Layer w7: v1(1071.63,681.89) 1083.36,693.62 Q2.2 R4.1
SDA: H1.2 Q1.3 R1.1 U3.20 U5.9 U6.4 U8.1 | length 4326.7
  Top Layer w7: U8.1 -16.57,620.32 -36.68,620.32 -91,566 -118,566 -160.51,523.49 -160.51,122.98 -140.51,102.98 -27.42,102.98 ; U5.9 -2.4,137.99 -16.5,123.9 -16.5,113.9 -27.42,102.98 ; v1(225.83,67.8) 251.73,41.89 713.09,41.89 787.09,115.89 787.09,192.89 817.09,222.89 882.09,222.89 1027.08,77.9 v1(1168.5,77.9) 1509.41,77.9 1543.5,111.99 1543.5,141.99 1549.82,148.31 U6.4 ; v1@225.83,67.98 197.58,67.98 87.58,-42.02 13.02,-42.02 -27.42,-1.58 -27.42,102.98
  Bottom Layer w7: v1(225.83,67.8) H1.2 225.83,-37.36 238.5,-50.04 328.5,-50.04 340.09,-38.46 340.09,203.24 396.3,259.45 396.3,294.45 416.3,314.45 441.3,314.45 474.37,347.52 U3.20 ; R1.1 1042.1,603.25 Q1.3 1048.5,596.85 1048.5,544.96 1063.5,529.96 1137.44,529.96 1168.5,498.9 v1(1168.5,77.9)
SDA_CO2: Q1.2 R2.1 U4.3 | length 551.9
  Top Layer w7: v1(1186.93,565.67) 1186.93,592.19 1202.72,607.98 1369.49,607.98 1394.49,582.98 1394.49,457.98 1415.97,436.5 U4.3
  Bottom Layer w7: Q1.2 v1(1186.93,565.67) ; v1@1186.93,566.89 R2.1
SPI_CLK: U3.35 X1.4 | length 813.2
  Top Layer w7: X1.4 676.57,235.37 771.09,329.89 902.09,329.89 935.09,296.89 962.09,296.89 994.09,328.89 994.09,425.89 958.09,461.89 906.09,461.89 893.09,474.89 v1(893.09,496.89)
  Bottom Layer w7: U3.35 U3.35@855.31,447.75 ; U3.35@856.53,448.97 U3.35@855.31,447.75 ; v1(893.09,496.89) 855.31,459.12 U3.35@855.31,447.75
SPI_MOSI: U3.36 X1.3 | length 840.6
  Top Layer w7: X1.3 679.01,207.81 774.09,302.89 902.09,302.89 928.09,276.89 972.09,276.89 1018.09,322.89 1018.09,447.89 975.09,490.89 v1(929.09,490.89)
  Bottom Layer w7: U3.36@876.12,448.87 U3.36 884.73,446.54 v1(929.09,490.89)
TFT_CS: U3.24 X1.7 | length 468.3
  Top Layer w7: v1(418.5,409.96) 403.5,394.96 403.5,330.02 415.47,318.05 X1.7
  Bottom Layer w7: v1(418.5,409.96) 434.8,426.26 U3.24
TONE: R15.2 U3.18 | length 1834.1
  Top Layer w7: v1(368.09,11.89) 713.09,11.89 808.09,106.89 808.09,183.35 825.63,200.89 879.09,200.89 1031.08,48.9 1406.61,48.9 v1(1462.52,-7.01)
  Bottom Layer w7: v1(368.09,11.89) 368.09,186.24 426.3,244.45 481.3,244.45 545.05,308.2 U3.18@636.08,308.2 ; R15.2 v1(1462.52,-7.01)
TXD: U2.20 U3.41 | length 793.4
  Bottom Layer w7: U2.20 731.73,749.02 766.3,714.45 766.3,689.45 821.3,634.45 906.3,634.45 921.09,619.66 921.09,567.43 986.3,502.22 986.3,361.56 973.63,348.89 925.09,348.89 923.72,347.52 U3.41
VUSB: C3.1 C12.1 C14.1 D1.1 F1.1 R12.2 U2.7 U2.8 U7.3 | length 1492.2
  Top Layer w7: v1(338.5,689.96) 338.5,779.96 377.52,818.98 v1(814.49,818.98)
  Bottom Layer w7: R12.2 -118.7,571.56 -105.77,584.49 C12.1 ; C12.1@9.04,584.25 85.01,584.25 86.63,585.87 v1(86.63,689.96) v1(338.5,689.96) C3.1 403.5,689.96 ; v1(161.06,136.46) F1.1 ; U2.7 408.11,670.28 403.5,674.88 403.5,689.96 ; U2.8 403.5,689.96 ; v1(814.49,818.98) D1.1 888.9,818.98 905.51,802.36 C14.1
XSHUT: R10.2 U5.5 | length 75
  Top Layer w7: R10.2 U5.5
pads on no net: A1. BZ1. D1.2 J1. J1.A8 J1.B8 S1. S2. U2.1 U2.9 U2.10 U2.11 U2.12 U2.13 U2.14 U2.15 U2.16 U2.17 U2.18 U2.22 U2.24 U3.5 U3.6 U3.7 U3.8 U3.10 U3.12 U3.14 U3.16 U3.21 U3.22 U3.25 U3.26 U3.27 U3.28 U3.29 U3.30 U3.31 U3.32 U3.33 U3.38 U3.44 U3.45 U3.47 U3.48 U5.7 U5.8 U7.4 U8.3 U8.4 X1.1 X1.2 X1.9

## Polygon pours and split planes (outlines as drawn)
+3.3V on Power (split plane): 1674.79,847.73 1684.02,846.73 1693.16,845.09 1702.16,842.79 1710.96,839.86 1719.54,836.3 1727.85,832.15 1735.83,827.41 1743.46,822.12 1750.69,816.29 1757.48,809.96 1763.81,803.17 1769.63,795.94 1774.93,788.31 1779.67,780.33 1783.82,772.02 1787.38,763.45 1790.31,754.64 1792.61,745.64 1794.25,736.5 1795.25,727.27 1795.53,719.21 1795.41,717.99 1795.41,-82.01 1795.53,-83.22 1795.25,-91.29 1794.25,-100.52 1792.61,-109.66 1790.31,-118.65 1787.38,-127.46 1783.82,-136.04 1779.67,-144.34 1774.93,-152.33 1769.63,-159.95 1763.81,-167.18 1757.48,-173.98 1750.69,-180.31 1743.46,-186.13 1735.83,-191.43 1727.85,-196.16 1719.54,-200.32 1710.96,-203.87 1702.16,-206.81 1693.16,-209.1 1684.02,-210.75 1674.79,-211.74 1666.73,-212.03 1665.51,-211.91 955.51,-211.94 955.51,-42.01 875.51,-42.01 875.51,192.99 815.51,192.99 815.51,-42.01 395.51,-42.01 395.51,-211.97 -134.49,-211.99 -135.08,-212.05 -143.77,-211.74 -153,-210.75 -162.14,-209.1 -171.13,-206.81 -179.94,-203.87 -188.52,-200.32 -196.82,-196.16 -204.81,-191.43 -212.43,-186.13 -219.66,-180.31 -226.46,-173.98 -232.79,-167.18 -238.61,-159.95 -243.91,-152.33 -248.64,-144.34 -252.8,-136.04 -256.35,-127.46 -259.29,-118.65 -261.58,-109.66 -263.23,-100.52 -264.22,-91.29 -264.51,-83.22 -264.39,-82.01 -264.39,717.99 -264.51,719.21 -264.22,727.27 -263.23,736.5 -261.58,745.64 -259.29,754.64 -256.35,763.45 -252.8,772.02 -248.64,780.33 -243.91,788.31 -238.61,795.94 -232.79,803.17 -226.46,809.96 -219.66,816.29 -212.43,822.12 -204.81,827.41 -196.82,832.15 -188.52,836.3 -179.94,839.86 -171.13,842.79 -162.14,845.09 -153,846.73 -143.77,847.73 -135.7,848.01 -134.49,847.9 1665.51,847.9 1666.73,848.01
VUSB on Power (split plane): 168.41,726.79 168.41,631.01 49.9,512.5 48.79,510.85 48.41,508.9 48.41,218.9 48.79,216.95 49.9,215.29 84.9,180.29 86.55,179.19 88.5,178.8 271.39,178.8 288.41,161.79 288.41,61.01 261.39,34 125.62,34 3.6,156.01 3.6,683.9 3.6,721.79 35.62,753.8 141.39,753.8
GND on GND (split plane): 1674.79,847.73 1684.02,846.73 1693.16,845.09 1702.16,842.79 1710.96,839.86 1719.54,836.3 1727.85,832.15 1735.83,827.41 1743.46,822.12 1750.69,816.29 1757.48,809.96 1763.81,803.17 1769.63,795.94 1774.93,788.31 1779.67,780.33 1783.82,772.02 1787.38,763.45 1790.31,754.64 1792.61,745.64 1794.25,736.5 1795.25,727.27 1795.53,719.21 1795.41,717.99 1795.41,-82.01 1795.53,-83.22 1795.25,-91.29 1794.25,-100.52 1792.61,-109.66 1790.31,-118.65 1787.38,-127.46 1783.82,-136.04 1779.67,-144.34 1774.93,-152.33 1769.63,-159.95 1763.81,-167.18 1757.48,-173.98 1750.69,-180.31 1743.46,-186.13 1735.83,-191.43 1727.85,-196.16 1719.54,-200.32 1710.96,-203.87 1702.16,-206.81 1693.16,-209.1 1684.02,-210.75 1674.79,-211.74 1666.73,-212.03 1665.51,-211.91 955.51,-211.94 955.51,-42.01 875.51,-42.01 875.51,192.99 815.51,192.99 815.51,-42.01 395.51,-42.01 395.51,-211.97 -134.49,-211.99 -135.08,-212.05 -143.77,-211.74 -153,-210.75 -162.14,-209.1 -171.13,-206.81 -179.94,-203.87 -188.52,-200.32 -196.82,-196.16 -204.81,-191.43 -212.43,-186.13 -219.66,-180.31 -226.46,-173.98 -232.79,-167.18 -238.61,-159.95 -243.91,-152.33 -248.64,-144.34 -252.8,-136.04 -256.35,-127.46 -259.29,-118.65 -261.58,-109.66 -263.23,-100.52 -264.22,-91.29 -264.51,-83.22 -264.39,-82.01 -264.39,717.99 -264.51,719.21 -264.22,727.27 -263.23,736.5 -261.58,745.64 -259.29,754.64 -256.35,763.45 -252.8,772.02 -248.64,780.33 -243.91,788.31 -238.61,795.94 -232.79,803.17 -226.46,809.96 -219.66,816.29 -212.43,822.12 -204.81,827.41 -196.82,832.15 -188.52,836.3 -179.94,839.86 -171.13,842.79 -162.14,845.09 -153,846.73 -143.77,847.73 -135.7,848.01 -134.49,847.9 1665.51,847.9 1666.73,848.01

## Keep-outs
Keep-Out Layer:
  lines w10: -284.57,-82.01 ccw(c-134.49,-82.01) -134.49,-232.09 ; -284.57,717.99 cw(c-134.49,717.99) -134.49,868.08 ; -284.49,-82.01 -284.49,717.99 ; -134.49,-232.01 1665.51,-232.01 ; -134.49,867.99 1665.51,867.99 ; 1665.51,-232.09 ccw(c1665.51,-82.01) 1815.59,-82.01 ; 1665.51,868.08 cw(c1665.51,717.99) 1815.59,717.99 ; 1815.51,-82.01 1815.51,717.99

## Other copper
Top Layer:
  pour cut-out: 395.51,-232.01 395.51,-42.01 815.51,-42.01 815.51,192.99 875.51,192.99 875.51,-42.01 955.51,-42.01 955.51,-232.01
  text "1" at 1502.51,-155.01 h40
Bottom Layer:
  rectangle net GND: -54.72,436.49 -29.72,491.49
  rectangle net GND: -54.72,141.49 -24.72,196.49
  pour cut-out: 395.51,-232.01 395.51,-42.01 815.51,-42.01 815.51,192.99 875.51,192.99 875.51,-42.01 955.51,-42.01 955.51,-232.01
  text "4" at 1518.51,-155.01 h40
Power (plane layer: these items are gaps in the copper):
  pour cut-out: 395.51,-232.01 395.51,-42.01 815.51,-42.01 815.51,192.99 875.51,192.99 875.51,-42.01 955.51,-42.01 955.51,-232.01
  lines w10: -1.5,153.9 123.5,28.9 263.5,28.9 293.5,58.9 293.5,163.9 273.5,183.9 88.5,183.9 53.5,218.9 53.5,508.9 173.5,628.9 173.5,728.9 143.5,758.9 33.5,758.9 -1.5,723.9 -1.5,683.9 -1.5,153.9
  text "2" at 1492.51,-155.01 h40
GND (plane layer: these items are gaps in the copper):
  pour cut-out: 395.51,-232.01 395.51,-42.01 815.51,-42.01 815.51,192.99 875.51,192.99 875.51,-42.01 955.51,-42.01 955.51,-232.01
  text "3" at 1492.51,-155.01 h40

## Silkscreen, mask and mechanical layers (free items; w line width, h text height)
Top Overlay:
  drawing of 540 lines, arcs and shapes, not listed
  text "Tmp" at -12.57,408.32 h40
  text "CO2" at 1462.43,354.99 h40
  text "@mikerankin" at 927.01,184.99 h35
  text "Light" at 1447.43,68.32 h40
  text "Range" at 7.43,-96.68 h40
Bottom Overlay:
  text "ESP32 Desktop" at 1503.51,808.32 h40
  text "Rev1.0" at 1503.51,739.99 h40
  text "Led" at 821,602 h40
  text "Button 1" at 1350,455 h40 r90
  text "Button 0" at 539,443 h40 r90
  text "Speaker" at 1721,107.33 h40
  text "Qwiic" at 337,-214 h40
Mechanical 1:
  lines w10: -284.57,-82.01 ccw(c-134.49,-82.01) -134.49,-232.09 ; -284.57,717.99 cw(c-134.49,717.99) -134.49,868.08 ; -284.49,-82.01 -284.49,717.99 ; -134.49,-232.01 1665.51,-232.01 ; -134.49,867.99 1665.51,867.99 ; 1665.51,-232.09 ccw(c1665.51,-82.01) 1815.59,-82.01 ; 1665.51,868.08 cw(c1665.51,717.99) 1815.59,717.99 ; 1815.51,-82.01 1815.51,717.99

## Dimensions
-284.49,717.99 to 1815.51,717.99 on Drill Drawing
-134.49,867.99 to -134.49,-232.01 on Drill Drawing

## Text inside footprints (layer, text, board x,y; h text height)
X1: Top Overlay "1" at 555.51,85.77 h35; Top Overlay "13" at 531.89,514.9 h35